# Altium PCB rev2.PcbDoc
Units mil, origin at the board's own origin, x right, y up, seen from the top; angles counter-clockwise.
Board outline 1530 x 1110 mil, 2 copper layers (Top Layer, Bottom Layer); 13 components, 14 nets, 53 pads, 22 vias.
Unrouted connection lines stored in the file: 12.
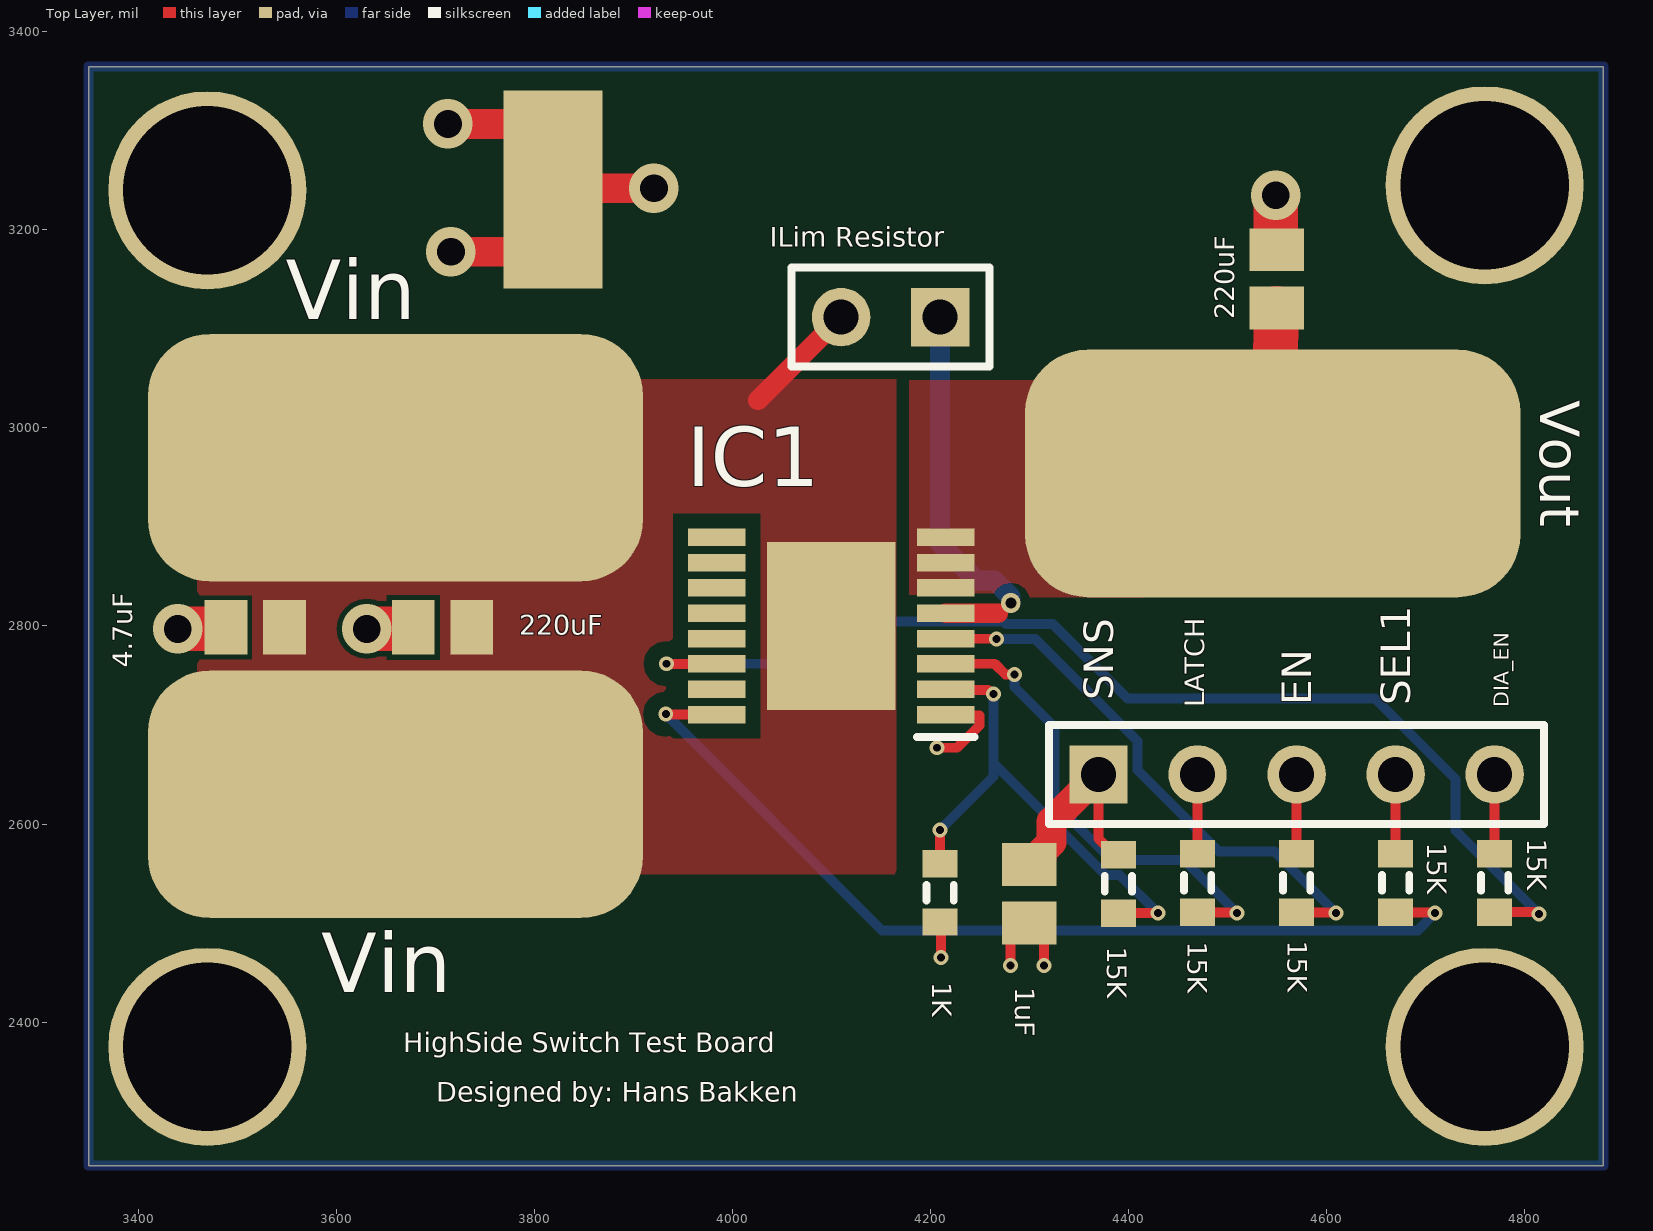
[diagram p0: Top Layer view]
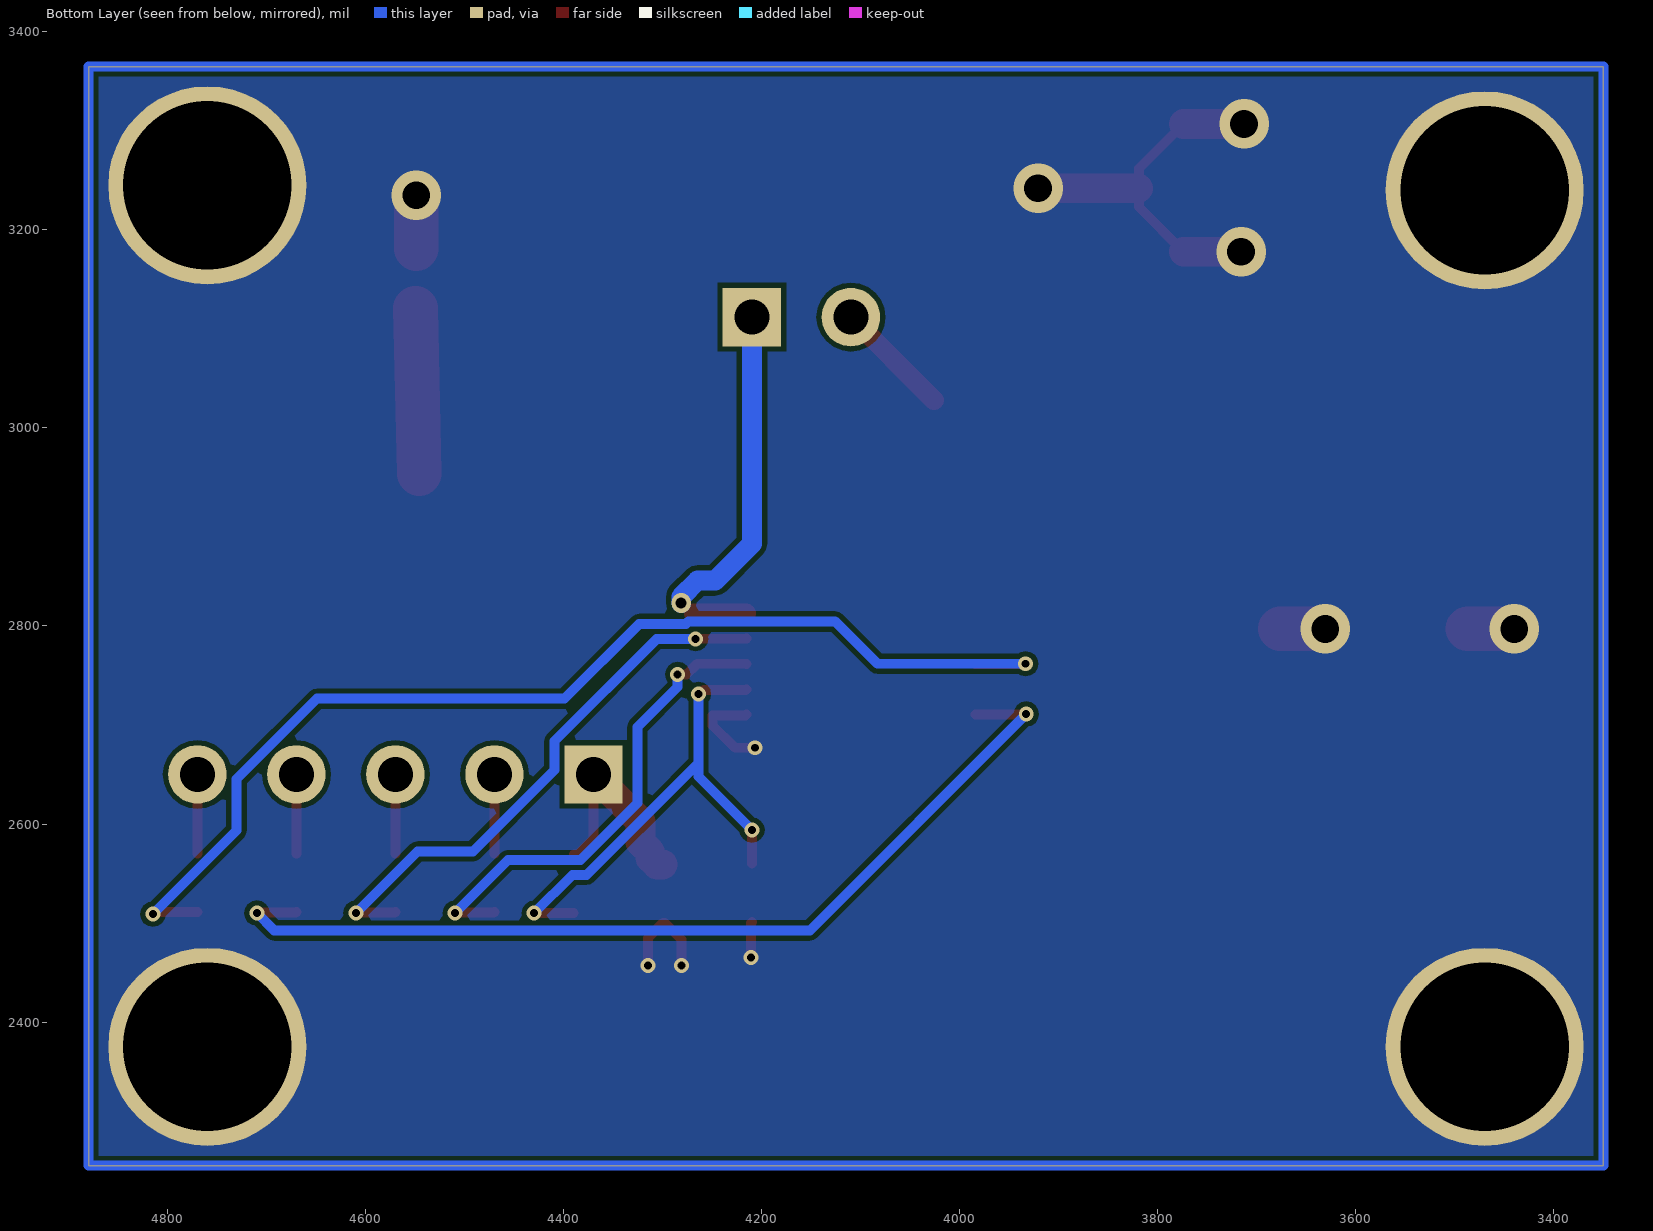
[diagram p1: Bottom Layer view, seen from below]

## Layer stack, top to bottom
Top Solder: solder mask 0.4, Solder Resist, Dk 3.5
Top Layer: signal copper 1.4
Dielectric 1: dielectric 12.6, FR-4, Dk 4.8
Bottom Layer: signal copper 1.4
Bottom Solder: solder mask 0.4, Solder Resist, Dk 3.5

## Board outline
3350,2255 4880,2255 4880,3365 3350,3365

## Design rules (kind name [scope] priority, off if disabled: settings)
Clearance Clearance_3 [InNamedPolygon('VOUT_L01_P007')] p1: gap=10 ignorepadtopadclearanceinfootprint=FALSE except(0: Arc-Hole Track-Hole SMDPad-Hole THPad-Hole Via-Hole Fill-Hole Poly-Hole Region-Hole Text-Hole)
Clearance Clearance_2 [InNamedPolygon('VOUT_L01_P007')] p2: gap=15 ignorepadtopadclearanceinfootprint=FALSE except(0: Arc-Hole Track-Hole SMDPad-Hole THPad-Hole Via-Hole Fill-Hole Poly-Hole Region-Hole Text-Hole; 5: THPad-Via THPad-Fill THPad-Poly THPad-Region THPad-Text)
Clearance 15 [InNamedPolygon('VCC_L01_P004')] p3: gap=15 ignorepadtopadclearanceinfootprint=FALSE except(0: Arc-Hole Track-Hole SMDPad-Hole THPad-Hole Via-Hole Fill-Hole Poly-Hole Region-Hole Text-Hole)
Clearance Clearance_1 [InNamedPolygon('VCC_L01_P004')] p4: gap=25 ignorepadtopadclearanceinfootprint=FALSE except(0: Arc-Hole Track-Hole SMDPad-Hole THPad-Hole Via-Hole Fill-Hole Poly-Hole Region-Hole Text-Hole)
Clearance [All] p5: gap=5 ignorepadtopadclearanceinfootprint=FALSE except(0: Arc-Hole Track-Hole SMDPad-Hole THPad-Hole Via-Hole Fill-Hole Poly-Hole Region-Hole Text-Hole)
PolygonConnect f [All vs IsNamedPolygon('GND_L02_P000')] p1: connectstyle=Direct reliefconductorwidth=10 reliefentries=4 polygonreliefangle="90 Angle" airgapwidth=10
PolygonConnect default_1 [All vs IsNamedPolygon('GND_L02_P000')] p2: thpad.connectstyle=Direct thpad.reliefconductorwidth=10 thpad.reliefentries=4 thpad.polygonreliefangle="90 Angle" thpad.airgapwidth=10 smdpad.connectstyle=Direct smdpad.reliefconductorwidth=10 smdpad.reliefentries=4 smdpad.polygonreliefangle="90 Angle" smdpad.airgapwidth=10 via.connectstyle=Relief via.reliefconductorwidth=10 via.reliefentries=4 via.polygonreliefangle="90 Angle" via.airgapwidth=10
PolygonConnect default [All vs IsNamedPolygon('GND_L02_P000')] p3: connectstyle=Relief reliefconductorwidth=10 reliefentries=4 polygonreliefangle="90 Angle" airgapwidth=10
PolygonConnect PolygonConnect_6 [All vs IsNamedPolygon('GND_L02_P000')] p4: thpad.connectstyle=Direct thpad.reliefconductorwidth=10 thpad.reliefentries=4 thpad.polygonreliefangle="90 Angle" thpad.airgapwidth=10 smdpad.connectstyle=Direct smdpad.reliefconductorwidth=10 smdpad.reliefentries=4 smdpad.polygonreliefangle="90 Angle" smdpad.airgapwidth=10 via.connectstyle=Relief via.reliefconductorwidth=10 via.reliefentries=4 via.polygonreliefangle="90 Angle" via.airgapwidth=10
PolygonConnect PolygonConnect_5 [All vs IsNamedPolygon('GND_L02_P000')] p5: thpad.connectstyle=Direct thpad.reliefconductorwidth=10 thpad.reliefentries=4 thpad.polygonreliefangle="90 Angle" thpad.airgapwidth=10 smdpad.connectstyle=Direct smdpad.reliefconductorwidth=10 smdpad.reliefentries=4 smdpad.polygonreliefangle="90 Angle" smdpad.airgapwidth=10 via.connectstyle=Relief via.reliefconductorwidth=10 via.reliefentries=4 via.polygonreliefangle="90 Angle" via.airgapwidth=10
PolygonConnect PolygonConnect_4 [All vs IsNamedPolygon('VOUT_L01_P007')] p6: thpad.connectstyle=Direct thpad.reliefconductorwidth=10 thpad.reliefentries=4 thpad.polygonreliefangle="90 Angle" thpad.airgapwidth=10 smdpad.connectstyle=Direct smdpad.reliefconductorwidth=10 smdpad.reliefentries=4 smdpad.polygonreliefangle="90 Angle" smdpad.airgapwidth=10 via.connectstyle=Relief via.reliefconductorwidth=10 via.reliefentries=4 via.polygonreliefangle="90 Angle" via.airgapwidth=10
PolygonConnect PolygonConnect_3 [All vs IsNamedPolygon('VCC_L01_P004')] p7: thpad.connectstyle=Direct thpad.reliefconductorwidth=10 thpad.reliefentries=4 thpad.polygonreliefangle="90 Angle" thpad.airgapwidth=10 smdpad.connectstyle=Direct smdpad.reliefconductorwidth=10 smdpad.reliefentries=4 smdpad.polygonreliefangle="90 Angle" smdpad.airgapwidth=10 via.connectstyle=Relief via.reliefconductorwidth=10 via.reliefentries=4 via.polygonreliefangle="90 Angle" via.airgapwidth=10
PolygonConnect PolygonConnect_2 [All vs IsNamedPolygon('VCC_L01_P002')] p8: thpad.connectstyle=Direct thpad.reliefconductorwidth=10 thpad.reliefentries=4 thpad.polygonreliefangle="90 Angle" thpad.airgapwidth=10 smdpad.connectstyle=Direct smdpad.reliefconductorwidth=10 smdpad.reliefentries=4 smdpad.polygonreliefangle="90 Angle" smdpad.airgapwidth=10 via.connectstyle=Relief via.reliefconductorwidth=10 via.reliefentries=4 via.polygonreliefangle="90 Angle" via.airgapwidth=10
PolygonConnect PolygonConnect_1 [All vs IsNamedPolygon('VCC_L01_P002')] p9: thpad.connectstyle=Direct thpad.reliefconductorwidth=10 thpad.reliefentries=4 thpad.polygonreliefangle="90 Angle" thpad.airgapwidth=10 smdpad.connectstyle=Direct smdpad.reliefconductorwidth=10 smdpad.reliefentries=4 smdpad.polygonreliefangle="90 Angle" smdpad.airgapwidth=10 via.connectstyle=Relief via.reliefconductorwidth=10 via.reliefentries=4 via.polygonreliefangle="90 Angle" via.airgapwidth=10
PolygonConnect [All] p10: connectstyle=Relief reliefconductorwidth=10 reliefentries=4 polygonreliefangle="90 Angle" airgapwidth=10
RoutingVias [All] p1: holewidth=28 width=50 viastyle="Through Hole" minholewidth=28 minwidth=50 maxholewidth=28 maxwidth=50
SolderMaskExpansion [All] p1: expansion=4 istentingtop=FALSE
Width [All] p1: maxlimit=1000 minlimit=10 preferedwidth=10
30 further rules are at their usual default settings.

## Components (designator, comment, footprint, x,y, rotation, side; value= is the part's Value field where it differs from the comment)
C1 "Cap" C0805 4300,2529.53 r270 top value=1nF
C2 "Cap" C0805 3518.32,2798.6 r180 top value=4.7nF
C3 "Cap" C0805 3707.47,2798.6 r180 top value=220nF
C4 "Cap" C0805 4550,3150.47 r90 top value=220nF
IC1 "TPS1HB35AQPWPRQ1" SOP65P640X120-17N 4100,2800 r180 top
P2 "Microcontroller" HDR1X5 4370,2650 r0 top
P4 "PowerIn" HDR1X2 4210,3112 r180 top
R1 "Res3" J1-0603#1 4390,2539.53 r270 top value=15K
R2 "Res3" J1-0603#1 4210,2530.47 r90 top value=1K
R3 "Res3" J1-0603#2 4470,2540.47 r90 top value=15K
R4 "Res3" J1-0603#1 4570,2540.47 r90 top value=15K
R5 "Res3" J1-0603#1 4670,2540.47 r90 top value=15K
R6 "Res3" J1-0603#1 4770,2540.47 r90 top value=15K

## Footprints (in the part's own frame and the unit in brackets; to place one, negate y for a bottom-side part, rotate by r counter-clockwise, add the part's x,y. Pads: shape width x height; smd on the part's side, far side on the other; paste and mask are expansions set on the pad)
C0805 [mm] "Chip Capacitor, Body 2.0x1.3mm, IPC High Density"
  rect 1.1x1.4 smd: 1(-0.75,0) 2(0.75,0)
  body extent -1.1,-0.72 1.1,0.72, height 1.4
HDR1X2 [mm] "Connector; Header; 2 Position"
  rect 1.5x1.5 hole 0.9: 1(0,0)
  round 1.5 hole 0.9: 2(2.54,0)
  silkscreen extent -1.27,-1.27 3.81,1.27
HDR1X5 [mm] "Connector; Header; 5 Position"
  rect 1.5x1.5 hole 0.9: 1(0,0)
  round 1.5 hole 0.9: 2(2.54,0) 3(5.08,0) 4(7.62,0) 5(10.16,0)
  silkscreen extent -1.27,-1.27 11.43,1.27
J1-0603#1 [mm] "Chip Resistor, Body 1.6x0.8mm, IPC High Density"
  rect 0.7x0.9 smd: 1(-0.75,0) 2(0.75,0)
  silkscreen extent -0.2,-0.35 0.2,0.35, body extent -0.85,-0.48 0.85,0.48, height 0.9
J1-0603#2 [mm] "Chip Resistor, Body 1.6x0.8mm, IPC High Density"
  rect 0.7x0.9 smd: 2(0.75,0) ""(-0.75,0)
  silkscreen extent -0.2,-0.35 0.2,0.35, body extent -0.85,-0.48 0.85,0.48, height 0.9
SOP65P640X120-17N [mm]
  rect 1.475x0.45 smd: 1(-2.938,2.275) 2(-2.938,1.625) 3(-2.938,0.975) 4(-2.938,0.325) 5(-2.938,-0.325) 6(-2.938,-0.975) 7(-2.938,-1.625) 8(-2.938,-2.275) 9(2.938,-2.275) 10(2.938,-1.625) 11(2.938,-0.975) 12(2.938,-0.325) 13(2.938,0.325) 14(2.938,0.975) 15(2.938,1.625) 16(2.938,2.275)
  rect 2.78x3.37 smd: 17(0,0)
  silkscreen extent -3.67,2.85 -2.2,2.85, body extent -3.2,-2.5 3.2,2.5, height 1.2

## Part data
C1 C2 C3 C4: library part "Cap Pol3", "Polarized Capacitor (Surface Mount)", LatestRevisionDate=29-May-2009, LatestRevisionNote="IPC-7351 Footprint Added.", PackageDescription="Chip Capacitor", PackageReference=C0805, Published=8-Jun-2000, Publisher="Altium Limited"
IC1: "Integrated Circuit", Manufacturer_Name="Texas Instruments", Mouser Part Number=595-TPS1HB35AQPWPRQ1, Datasheet Link=https://www.ti.com/lit/ds/symlink/tps1hb35-q1.pdf?ts=1623228312677&ref_url=https%253A%252F%252Fwww.google.com%252F, Height=1.2mm, Manufacturer_Part_Number=TPS1HB35AQPWPRQ1, Mouser Price/Stock=https://www.mouser.co.uk/ProductDetail/Texas-Instruments/TPS1HB35AQPWPRQ1?qs=KUoIvG%2F9IlYFS2ZDCuDTOg%3D%3D
P2: library part "Header 5", "Header, 5-Pin", LatestRevisionDate=17-Jul-2002, LatestRevisionNote="Re-released for DXP Platform.", Publisher="Altium Limited"
P4: library part "Header 2", "Power Header", LatestRevisionDate=17-Jul-2002, LatestRevisionNote="Re-released for DXP Platform.", Publisher="Altium Limited"
R1 R2 R3 R4 R5 R6: "Resistor", LatestRevisionDate=29-May-2009, LatestRevisionNote="IPC-7351 Footprint Added.", PackageDescription="Chip Resistor", PackageReference=J1-0603, Published=8-Jun-2000, Publisher="Altium Limited"

## Free pads (board coordinates)
  rrect50% 500x250 smd: 3(3660,2630) 3(3660,2970) 3(4546,2954)
  round 200 hole 170: 4(3470,2375) 4(3470,3240) 4(4760,2375) 4(4760,3245)
  rect 130x170 smd: 5(4100,2800)
  rect 100x200 smd: 6(3819,3241)

## Via types
v1: diameter 15, hole 8, Top Layer to Bottom Layer, 15 vias
v2: diameter 50, hole 28, Top Layer to Bottom Layer, 6 vias
v3: diameter 20, hole 11, Top Layer to Bottom Layer, 1 vias

## Nets (pads, with @x,y where several pads share a name; then routed paths per layer and width w, separated by ;. In a path a pad name is that pad's centre, name@x,y a point inside that pad or via, vN(x,y) a via of type N, cw(c..) or ccw(c..) an arc to the next point about the centre after c; other vN are vias at no path point)
Device_SNS: IC1.2 R1.2 R2.2 | length 512.6
  Top Layer w10: R2.2 v1(4210,2594) ; IC1.2 4216.18,2735.51 4258.39,2735.51 4262.77,2731.13 v1(4264.13,2731.13) ; R1.2 v1(4430,2510)
  Bottom Layer w10: v1(4210,2594) 4264.13,2648.13 4264.13,2661.46 ; v1(4264.13,2731.13) 4264.13,2661.46 ; v1(4430,2510) 4391.36,2548.64 4376.95,2548.64 4264.13,2661.46
DIA_EN: IC1.14 R6.1 | length 1148.6
  Top Layer w10: v1(3933.56,2761.85) 3933.68,2761.73 3984.21,2761.73 IC1.14 ; R6.1 4811.7,2510.94 4813.65,2509 v1(4815,2509)
  Bottom Layer w10: v1(3933.56,2761.85) 4083.26,2761.85 4125.9,2804.5 4274.25,2804.5 4276.75,2802 4323.86,2802 4399.28,2726.57 4649.33,2726.57 4730.47,2645.43 4730.47,2593.53 v1(4815,2509)
GND: C1.2 C2.2 C3.2 C4.2 IC1.1 pad.4 pad.6 R2.1 | length 773.1
  Top Layer w10: C2.2@3487.19,2797 C2.2 ; C3.2@3676.34,2797 C3.2 ; pad.6@3774,3178 3819,3223 pad.6 ; pad.6@3774,3307 3819,3262 pad.6 ; pad.6@3820,3242 pad.6 ; v1(4207,2677) 4227.2,2677 4249.7,2699.5 4249.7,2709.72 4216.39,2709.72 IC1.1 ; R2.1 4211,2499.94 v1(4211,2465) ; v1(4281,2457) 4281,2483.35 4297.65,2500 C1.2 4315,2485 v1(4315,2457)
  Top Layer w30: v2(3713,3307) pad.6@3774,3307 ; v2(3716,3178) pad.6@3774,3178 ; pad.6@3820,3242 v2(3921,3242)
  Top Layer w45: v2(3440,2797) C2.2@3487.19,2797 ; v2(3631,2797) C3.2@3676.34,2797 ; C4.2@4549,3181 v2(4549,3235)
Micro_SNS: C1.1 P2.1 R1.1 | length 214.9
  Top Layer w10: P2.1 4370,2585.12 4386.06,2569.06 R1.1
  Top Layer w30: C1.1 4305.91,2559.06 4312.56,2565.71 4312.56,2571.61 4322.56,2581.61 4322.56,2602.56 P2.1
NetIC1_3: IC1.3 R3. | length 491.4
  Top Layer w10: IC1.3 4215.86,2761.81 4265.19,2761.81 4276,2751 v1(4285,2751) ; R3. 4470.47,2510.47 4509.53,2510.47 v1(4510,2510)
  Bottom Layer w10: v1(4285,2751) 4285,2738.48 4325.56,2697.92 4325.56,2621.24 4383.16,2563.64 4456.36,2563.64 v1(4510,2510)
NetIC1_4: IC1.4 R4.1 | length 566.6
  Top Layer w10: IC1.4 4215.77,2787.1 4266.9,2787.1 v1(4267,2787) ; R4.1 4570.47,2510.47 4609.53,2510.47 v1(4610,2510)
  Bottom Layer w10: v1(4267,2787) 4306.2,2787 4409.53,2683.67 4409.53,2654.57 4491.81,2572.29 4547.71,2572.29 v1(4610,2510)
NetIC1_5: IC1.5 P4.1 | length 399.1
  Top Layer w10: 4268.38,2812.8 4278.74,2823.16 v3(4281.45,2823.16)
  Top Layer w20: IC1.5 4268.38,2812.8
  Bottom Layer w20: P4.1 4210,2883 4247,2846 4265,2846 4281.45,2829.55 v3(4281.45,2823.16)
NetP2_2: P2.2 R3.2 | length 80
  Top Layer w10: R3.2 P2.2
NetP2_3: P2.3 R4.2 | length 80
  Top Layer w10: R4.2 P2.3
NetP2_4: P2.4 R5.2 | length 80
  Top Layer w10: R5.2 P2.4
NetP2_5: P2.5 R6.2 | length 80
  Top Layer w10: R6.2 P2.5
SEL1: IC1.16 R5.1 | length 966.7
  Top Layer w10: v1(3933,2711) 3933.28,2710.72 3984.05,2710.72 IC1.16 ; R5.1 4670.47,2510.47 4709.53,2510.47 v1(4710,2510)
  Bottom Layer w10: v1(3933,2711) 4151.5,2492.5 4692.5,2492.5 v1(4710,2510)
VCC: C2.1 C3.1 IC1.17 P4.2 pad.3@3660,2630 pad.3@3660,2970 pad.5 | length 118.8
  Top Layer w20: 4026,3028 P4.2
Vout: C4.1 IC1.6 IC1.7 IC1.8 pad.3@4546,2954 | length 166.9
  Top Layer w45: pad.3@4546,2954 4545.79,2954.22 C4.1@4549.78,3120.74
pads on no net: IC1.9 IC1.10 IC1.11 IC1.12 IC1.13 IC1.15
copper on no net: | length 5280
  Bottom Layer w10: 3350,2255 4880,2255 4880,3365 3350,3365 3350,2255

## Polygon pours and split planes (outlines as drawn)
GND on Bottom Layer "GND_L02_P000" (solid, pour order 0): 3350,3365 4880,3365 4880,2255 3350,2255
Vout on Top Layer "VOUT_L01_P007" (solid, pour order 7): 4417,2830 4416,2829 4179,2829 4179,3048 4417,3048
no net on Top Layer "NONET_L01_P005" (solid, pour order 5): 4741,2835
VCC on Top Layer "VCC_L01_P004" (solid, pour order 4): 3471,3049 4166,3049 4166,2549 4165,2548 4164,2549 3472,2549
VCC on Top Layer "VCC_L01_P002" (solid, pour order 2): 3460,2980 3850,2980 3850,2650 3460,2650

## Other copper
Bottom Layer:
  region: 3430,2755
  region: 4375,2765

## Silkscreen, mask and mechanical layers (free items; w line width, h text height)
Top Overlay:
  text "ILim Resistor" at 4038,3183 h20
  text "Vin" at 3549,3110 h60
  text "220uF" at 4507,3110 h20 r90
  text "Vout" at 4816,3028 h40 r270
  text "220uF" at 3785,2791 h20
  text "4.7uF" at 3394,2758 h20 r90
  text "SNS" at 4385,2725 h30 r90
  text "EN" at 4585,2720 h30 r90
  text "SEL1" at 4685,2720 h30 r90
  text "LATCH" at 4477,2718 h20 r90
  text "DIA_EN" at 4784.5,2718 h15 r90
  text "15K" at 4803,2585 h20 r270
  text "15K" at 4702,2581 h20 r270
  text "15K" at 4561,2482 h20 r270
  text "15K" at 4460,2481 h20 r270
  text "15K" at 4379,2476 h20 r270
  text "1K" at 4202,2440 h20 r270
  text "1uF" at 4286,2435 h20 r270
  text "Vin" at 3585,2430 h60
  text "HighSide Switch Test Board" at 3668,2369.66 h20
  text "Designed by: Hans Bakken" at 3701,2319.66 h20